# Altium PCB PCB_LoraE32_Receive_V1.0.PcbDoc
Units mm, origin at the board's own origin, x right, y up, seen from the top; angles counter-clockwise.
Board outline 84 x 69 mm, 2 copper layers (Top Layer, Bottom Layer); 9 components, 16 nets, 62 pads, 6 vias.
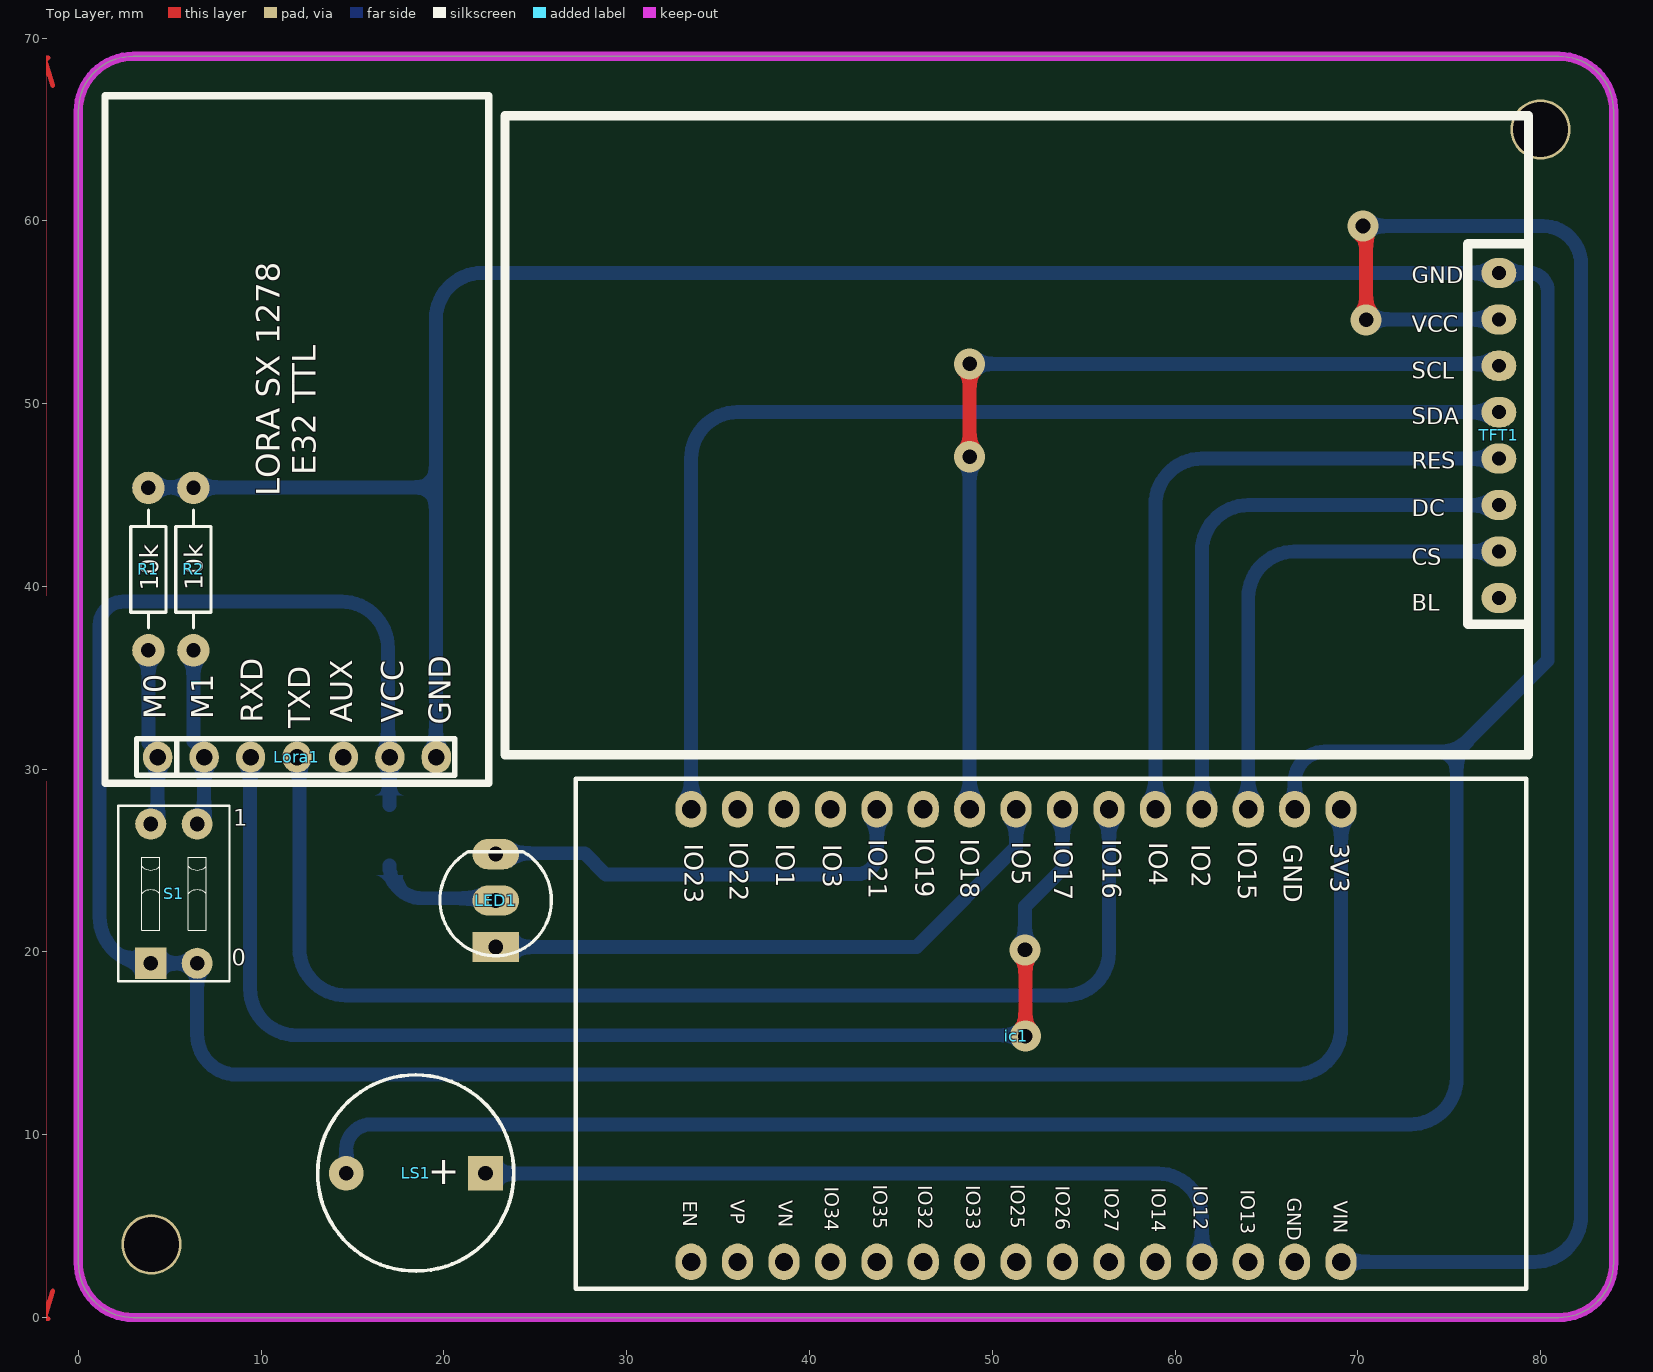
[diagram p0: Top Layer view]
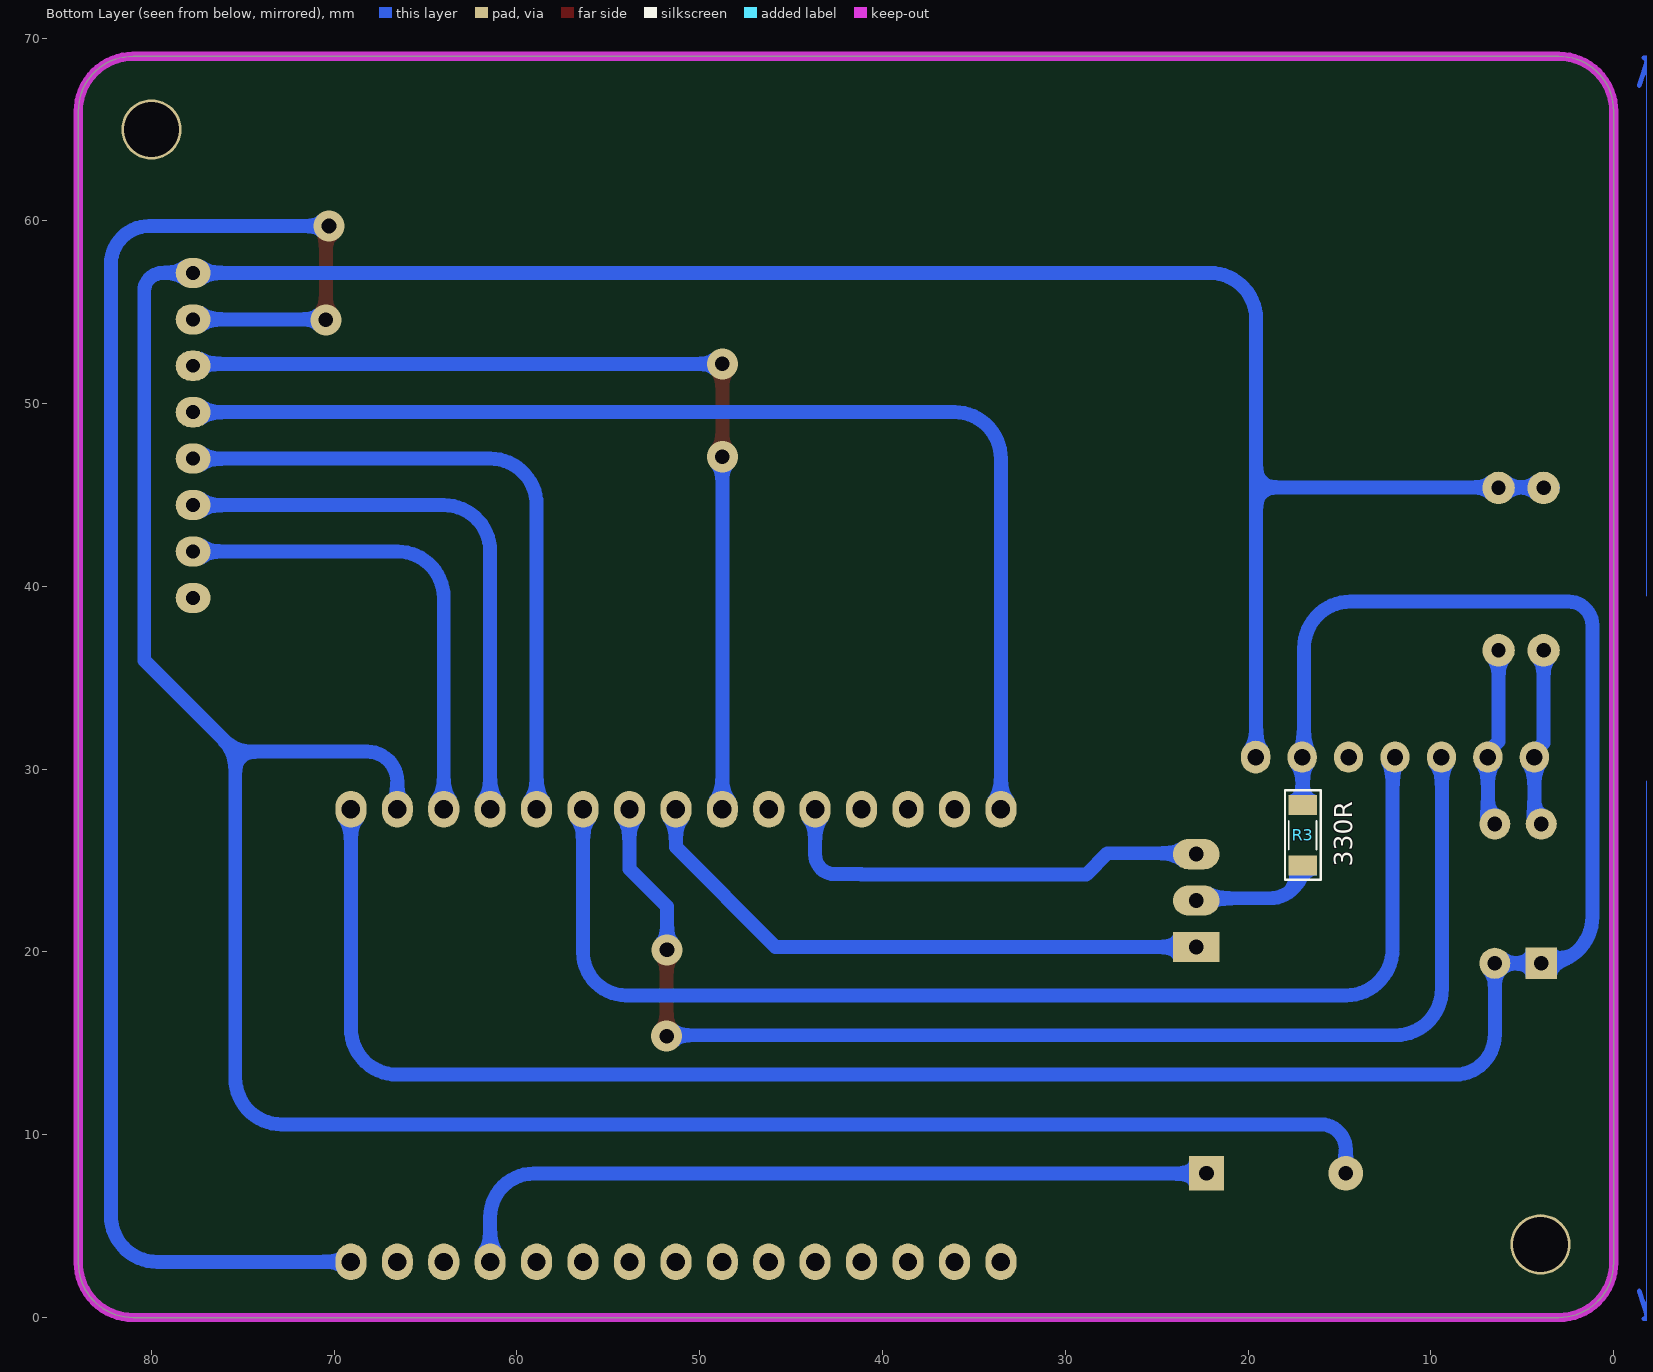
[diagram p1: Bottom Layer view, seen from below]

## Layer stack, top to bottom
Top Solder: solder mask 0.0102, Solder Resist, Dk 3.5
Top Layer: signal copper 0.0356
Dielectric 1: dielectric 0.32, FR-4, Dk 4.8
Bottom Layer: signal copper 0.0356
Bottom Solder: solder mask 0.0102, Solder Resist, Dk 3.5

## Board outline
3,0 cw(c3,3) 0,3 0,66 cw(c3,66) 3,69 81,69 cw(c81,66) 84,66 84,3 cw(c81,3) 81,0

## Design rules (kind name [scope] priority, off if disabled: settings)
Clearance [All] p1: gap=0.508 ignorepadtopadclearanceinfootprint=FALSE
PolygonConnect [All] p1: connectstyle=Relief reliefconductorwidth=0.254 reliefentries=4 polygonreliefangle="90 Angle" airgapwidth=0.254
RoomDefinition Sheet_LoraE32_Receive_V1.0 [InComponentClass('Sheet_LoraE32_Receive_V1.0')] p1: confinementstyle=ConfineIn formatcopy=TRUE lockcomponents=FALSE outline -39.624,-58.039 11.176,-58.039 11.176,-32.639 -39.624,-32.639
RoutingVias [All] p1: holewidth=0.8 width=1.7 viastyle="Through Hole" minholewidth=0.711 minwidth=1.27 maxholewidth=0.711 maxwidth=1.27
SolderMaskExpansion [All] p1: expansion=0.102 istentingtop=FALSE
Width [All] p1: maxlimit=1.778 minlimit=0.508 preferedwidth=0.762
30 further rules are at their usual default settings.

## Components (designator, comment, footprint, x,y, rotation, side; value= is the part's Value field where it differs from the comment)
ic1 "ESP32 DevKit 30Pin" "ESP32 DevKit V1 30Pin CAo" 81.593,32.532 r180 top
LED1 "LED" LED-52 22.835,20.269 r90 top value="LED 3 - 5 ly 2 Colour"
Lora1 "LORA E32 TTL" "LORA E32 TTL CAO" 22.583,29.038 r90 top
LS1 "Speaker" SPEAKER 22.276,7.899 r180 top
R1 "10k" R1/4W 3.835,45.39 r270 top
R2 "10k" R1/4W 6.299,45.39 r270 top
R3 "330R" RES-1206 17.018,28.042 r270 bottom
S1 "" SW-DIP2 5.232,23.19 r0 top
TFT1 "TFT SPI" "TFT 1.8 SPI" 66.574,18.09 r0 top

## Footprints (in the part's own frame and the unit in brackets; to place one, negate y for a bottom-side part, rotate by r counter-clockwise, add the part's x,y. Pads: shape width x height; smd on the part's side, far side on the other; paste and mask are expansions set on the pad)
"ESP32 DevKit V1 30Pin CAo" [mm]
  oval 1.7x2 hole 1: 1(12.505,4.719) 2(15.045,4.719) 3(17.585,4.719) 4(20.125,4.719) 5(22.665,4.719) 6(25.205,4.719) 7(27.745,4.719) 8(30.285,4.719) 9(32.825,4.719) 10(35.365,4.719) 11(37.905,4.719) 12(40.445,4.719) 13(42.985,4.719) 14(45.525,4.719) 15(48.065,4.719) 16(48.065,29.489) 17(45.525,29.489) 18(42.985,29.489) 19(40.445,29.489) 20(37.905,29.489) 21(35.365,29.489) 22(32.825,29.489) 23(30.285,29.489) 24(27.745,29.489) 25(25.205,29.489) 26(22.665,29.489) 27(20.125,29.489) 28(17.585,29.489) 29(15.045,29.489) 30(12.505,29.489)
  silkscreen extent 2.37,3.06 54.37,30.96, body extent 2.54,2.91 53.47,31.41, height 13.7
LED-52 [mil] "LED 3 PIN, 5 ly , Two colour"
  rect 65x100 hole 32: 1(0,0)
  oval 65x100 hole 32: 2(100,0) 3(200,0)
  silkscreen extent -19,-120 205,120, body extent -16,-116 210,116, height 427
"LORA E32 TTL CAO" [mm]
  oval 1.8x1.6 hole 0.9: 1(1.62,3)
  oval 1.7x1.6 hole 0.9: 2(1.62,5.54) 3(1.62,8.08) 4(1.62,10.62) 5(1.62,13.16) 6(1.62,15.7) 7(1.62,18.24)
  silkscreen extent 0.2,0.12 37.8,21.12, body extent 0.2,0.12 48.7,21.12, height 14.9
R1/4W [mil] "R 1/4W, 2 Pin, 350mil"
  round 70 hole 31: 1(0,0) 2(350,0)
  silkscreen extent 48,-38 302,38, body extent -40,-47 386,47, height 111
RES-1206 [mm]
  rect 1.1x1.55 smd: 1(0,0) 2(3.302,0)
  silkscreen extent -0.8,-0.97 4.1,1, body extent 0.05,-0.8 3.25,0.8, height 1.02
SPEAKER [mm]
  rect 1.9x1.9 hole 0.8: 1(0,0)
  round 1.9 hole 0.8: 2(7.62,0.013)
  silkscreen extent -1.55,-5.38 9.18,5.36, body extent -2.22,-6 13.24,6, height 3.5
SW-DIP2 [mm] "02p, 2.54mm Pitch, Horizontal, Box Type, THT, flat Actuator, red, without Tape, Tube"
  rect 1.7x1.7 hole 0.8: 1(-1.27,-3.81)
  round 1.7 hole 0.8: 2(1.27,-3.81) 3(1.27,3.81) 4(-1.27,3.81)
  silkscreen extent -3.04,-4.8 3.04,4.8, body extent -3.04,-4.7 3.04,4.9, height 5.4
"TFT 1.8 SPI" [mm]
  oval 1.9x1.65 hole 0.762: BL(11.15,21.28) CS(11.15,23.82) DC(11.15,26.36) GND(11.15,39.06) RES(11.15,28.9) SCL(11.15,33.98) SDA(11.15,31.44) VCC(11.15,36.52)
  silkscreen extent -43.23,12.7 12.77,47.66, body extent -43.24,12.7 12.76,47.7, height 4.15

## Part data
LED1: library part "LED 2A", "Anot Comment Green and Red"
LS1: "Loudspeaker", LatestRevisionDate=17-Jul-2002, LatestRevisionNote="Re-released for DXP Platform.", PackageReference=PIN2, Published=24-Mar-1999, Publisher="Altium Limited"
R1 R2: library part "Res DIP", "Res"
R3: library part "Res SMD", "Res"
S1: library part SWDIP2, "WS-DITV 2.54 mm small compact THT flat actuator with top tape", Manufacturer="Wurth Elektronik", Part No.=418127160902, ComponentLink1 Description=Manufacturer, ComponentLink1URL=http://www.we-online.com, ComponentLink2 Description=Datasheet, ComponentLink2URL=http://katalog.we-online.de/em/datasheet/4181271609xx.pdf, Created by="Baojun Chen", Created Date=Dec.2015, Pole=02

## Free pads (board coordinates)
  round 3.3 hole 3: 0(4,4) 0(80,65)

## Via types
v1: diameter 1.7, hole 0.8, Top Layer to Bottom Layer, 6 vias

## Nets (pads, with @x,y where several pads share a name; then routed paths per layer and width w, separated by ;. In a path a pad name is that pad's centre, name@x,y a point inside that pad or via, vN(x,y) a via of type N, cw(c..) or ccw(c..) an arc to the next point about the centre after c; other vN are vias at no path point)
3.3V: ic1.1 Lora1.2 R3.1 S1.1 S1.2 | length 130.5
  Bottom Layer w0.762: R3.1 17.018,30.607 16.942,30.683 16.942,36.627 ccw(c14.402,36.627) 14.402,39.167 2.464,39.167 ccw(c2.464,37.871) 1.168,37.871 1.168,21.92 ccw(c3.708,21.92) 3.708,19.38 S1.1 S1.2 6.502,15.498 6.502,15.495 ccw(c8.691,15.472) 8.691,13.284 66.548,13.284 ccw(c66.548,15.824) 69.088,15.824 ic1.1
5V: ic1.30 TFT1.VCC | length 92.2
  Top Layer w0.762: v1(70.282,59.715) 70.46,59.538 v1(70.46,54.585)
  Bottom Layer w0.762: ic1.30 79.68,3.043 ccw(c79.68,5.583) 82.22,5.583 82.22,57.607 ccw(c80.112,57.607) 80.112,59.715 v1(70.282,59.715) ; v1(70.46,54.585) 70.485,54.61 TFT1.VCC
E32_RX: ic1.7 Lora1.5 | length 69.8
  Top Layer w0.762: v1(51.791,20.117) 51.816,20.091 v1(51.816,15.392)
  Bottom Layer w0.762: Lora1.5@9.398,30.607 9.398,17.983 ccw(c11.938,17.983) 11.938,15.443 51.765,15.443 v1(51.816,15.392) ; v1(51.791,20.117) 51.791,22.479 53.848,24.536 ic1.7
E32_TX: ic1.6 Lora1.4 | length 65.4
  Bottom Layer w0.762: Lora1.4@11.938,30.607 12.098,30.447 12.098,20.168 ccw(c14.638,20.168) 14.638,17.628 54.026,17.628 ccw(c54.026,19.99) 56.388,19.99 ic1.6
GND: ic1.2 Lora1.1 LS1.2 R1.1 R2.1 TFT1.GND | length 223.8
  Bottom Layer w0.762: R1.1@3.318,45.415 19.558,45.415 ; LS1.2 14.656,9.195 cw(c16.027,9.195) 16.027,10.566 72.873,10.566 ccw(c72.873,13.106) 75.413,13.106 75.413,30.963 ; Lora1.1@19.558,30.607 19.558,45.415 ; ic1.2 66.548,29.312 cw(c68.199,29.312) 68.199,30.963 75.413,30.963 ; 19.558,45.415 19.558,54.61 cw(c22.098,54.61) 22.098,57.15 TFT1.GND 79.4,57.15 cw(c79.4,56.159) 80.391,56.159 80.391,35.941 75.413,30.963
GPIO2: ic1.4 TFT1.DC | length 31.8
  Bottom Layer w0.762: ic1.4 61.468,41.91 cw(c64.008,41.91) 64.008,44.45 TFT1.DC
GPIO4: ic1.5 TFT1.RES | length 36.9
  Bottom Layer w0.762: ic1.5 58.928,44.45 cw(c61.468,44.45) 61.468,46.99 TFT1.RES
GPIO5: ic1.8 LED1.1 | length 32.8
  Bottom Layer w0.762: LED1.1 45.847,20.269 51.308,25.73 ic1.8
GPIO12: ic1.27 LS1.1 | length 43.1
  Bottom Layer w0.762: LS1.1@22.22,7.874 59.08,7.874 cw(c59.08,5.486) 61.468,5.486 ic1.27
GPIO15: ic1.3 TFT1.CS | length 26.7
  Bottom Layer w0.762: ic1.3 64.008,39.37 cw(c66.548,39.37) 66.548,41.91 TFT1.CS
GPIO18: ic1.9 TFT1.SCL | length 53.4
  Top Layer w0.762: v1(48.768,47.092) v1(48.768,52.172)
  Bottom Layer w0.762: ic1.9 v1(48.768,47.092) ; v1(48.768,52.172) 77.622,52.172 TFT1.SCL
GPIO21: ic1.11 LED1.3 | length 24.5
  Bottom Layer w0.762: LED1.3 22.885,25.4 27.686,25.4 28.854,24.232 41.148,24.232 41.173,24.257 42.621,24.257 ccw(c42.621,25.324) 43.688,25.324 ic1.11
GPIO23: ic1.15 TFT1.SDA | length 64.8
  Bottom Layer w0.762: ic1.15 33.528,46.99 cw(c36.068,46.99) 36.068,49.53 TFT1.SDA
NetLED1_2: LED1.2 R3.2 | length 7
  Bottom Layer w0.762: R3.2 ccw(c18.821,24.74) 18.821,22.936 22.551,22.936 LED1.2@22.835,23.22
NetLora1_6: Lora1.6 R2.2 S1.3 | length 9.9
  Bottom Layer w0.762: R2.2 6.299,31.519 6.883,30.935 Lora1.6 6.883,27.635 6.502,27.254 S1.3
NetLora1_7: Lora1.7 R1.2 S1.4 | length 9.8
  Bottom Layer w0.762: R1.2 3.835,31.443 4.343,30.935 Lora1.7 4.343,27.635 3.886,27.178 S1.4@3.886,27.076
pads on no net: ic1.10 ic1.12 ic1.13 ic1.14 ic1.16 ic1.17 ic1.18 ic1.19 ic1.20 ic1.21 ic1.22 ic1.23 ic1.24 ic1.25 ic1.26 ic1.28 ic1.29 Lora1.3 TFT1.BL

## Keep-outs
Keep-Out Layer:
  the board outline again, w0.508

## Other copper
Multi-Layer:
  lines w0.254: -2.41,1.448 -1.902,-0.076 ; -2.41,67.4 -1.902,68.924 ; -2.156,-0.076 -1.648,-0.076 ; -2.156,68.924 -1.648,68.924 ; -1.902,29.32 -1.902,-0.076 ; -1.902,39.528 -1.902,68.924 ; -1.394,1.448 -1.902,-0.076 ; -1.394,67.4 -1.902,68.924 ; 0,-3.048 0,-2.54 ; 1.524,-3.302 0,-2.794 ; 1.524,-2.286 0,-2.794 ; 36.896,-2.794 0,-2.794 ; 47.104,-2.794 84,-2.794 ; 82.476,-3.302 84,-2.794 ; 82.476,-2.286 84,-2.794 ; 84,-3.048 84,-2.54
  text "69 (mm)" at -0.988,29.574 h1.52 r90
  text "84 (mm)" at 37.15,-3.708 h1.52

## Silkscreen, mask and mechanical layers (free items; w line width, h text height)
Top Overlay:
  text "1" at 8.484,26.899 h0.89
  text "0" at 8.407,19.253 h0.89

## Text inside footprints (layer, text, board x,y; h text height)
ic1: Top Overlay "3V3" at 68.532,25.957 h1.02 r270; Top Overlay "GND" at 65.953,25.892 h1.02 r270; Top Overlay "IO15" at 63.453,26.092 h1.02 r270; Top Overlay "IO2" at 60.923,25.892 h1.02 r270; Top Overlay "IO4" at 58.583,26.012 h1.02 r270; Top Overlay "IO16" at 56.043,26.162 h1.02 r270; Top Overlay "IO17" at 53.393,26.082 h1.02 r270; Top Overlay "IO5" at 51.093,26.042 h1.02 r270; Top Overlay "IO18" at 48.283,26.202 h1.02 r270; Top Overlay "IO19" at 45.823,26.242 h1.02 r270; Top Overlay "IO21" at 43.243,26.162 h1.02 r270; Top Overlay "IO3" at 40.753,25.882 h1.02 r270; Top Overlay "IO1" at 38.173,25.922 h1.02 r270; Top Overlay "IO22" at 35.643,26.042 h1.02 r270; Top Overlay "IO23" at 33.183,25.922 h1.02 r270; Top Overlay "VIN" at 68.693,6.392 h0.76 r270; Top Overlay "GND" at 66.133,6.542 h0.76 r270; Top Overlay "IO13" at 63.603,6.992 h0.76 r270; Top Overlay "IO12" at 61.013,7.222 h0.76 r270; Top Overlay "IO14" at 58.723,7.112 h0.76 r270; Top Overlay "IO27" at 56.153,7.112 h0.76 r270; Top Overlay "IO26" at 53.473,7.222 h0.76 r270; Top Overlay "IO25" at 51.003,7.282 h0.76 r270; Top Overlay "IO33" at 48.583,7.232 h0.76 r270; Top Overlay "IO32" at 45.953,7.232 h0.76 r270; Top Overlay "IO35" at 43.493,7.262 h0.76 r270; Top Overlay "IO34" at 40.833,7.152 h0.76 r270; Top Overlay "VN" at 38.313,6.412 h0.76 r270; Top Overlay "VP" at 35.703,6.442 h0.76 r270; Top Overlay "EN" at 33.103,6.382 h0.76 r270
Lora1: Top Overlay "LORA SX 1278  /   E32 TTL" at 12.983,44.938 h1.3 r90; Top Overlay "GND" at 20.383,32.438 h1.2 r90; Top Overlay "VCC" at 17.783,32.538 h1.2 r90; Top Overlay "AUX" at 14.983,32.538 h1.2 r90; Top Overlay "TXD" at 12.683,32.238 h1.2 r90; Top Overlay "RXD" at 10.083,32.538 h1.2 r90; Top Overlay "M1" at 7.383,32.738 h1.2 r90; Top Overlay "M0" at 4.783,32.738 h1.2 r90
LS1: Top Overlay "+" at 20.866,8.611 h1.52 r180
TFT1: Top Overlay "DC" at 72.954,43.85 h0.89; Top Overlay "SCL" at 72.954,51.36 h0.89; Top Overlay "SDA" at 72.954,48.86 h0.89; Top Overlay "RES" at 72.954,46.43 h0.89; Top Overlay "BL" at 72.954,38.67 h0.89; Top Overlay "CS" at 72.954,41.16 h0.89; Top Overlay "VCC" at 72.954,53.91 h0.89; Top Overlay "GND" at 72.954,56.58 h0.89